# EAGLE board StoneWS_v2 (EAGLE 9.6.2)
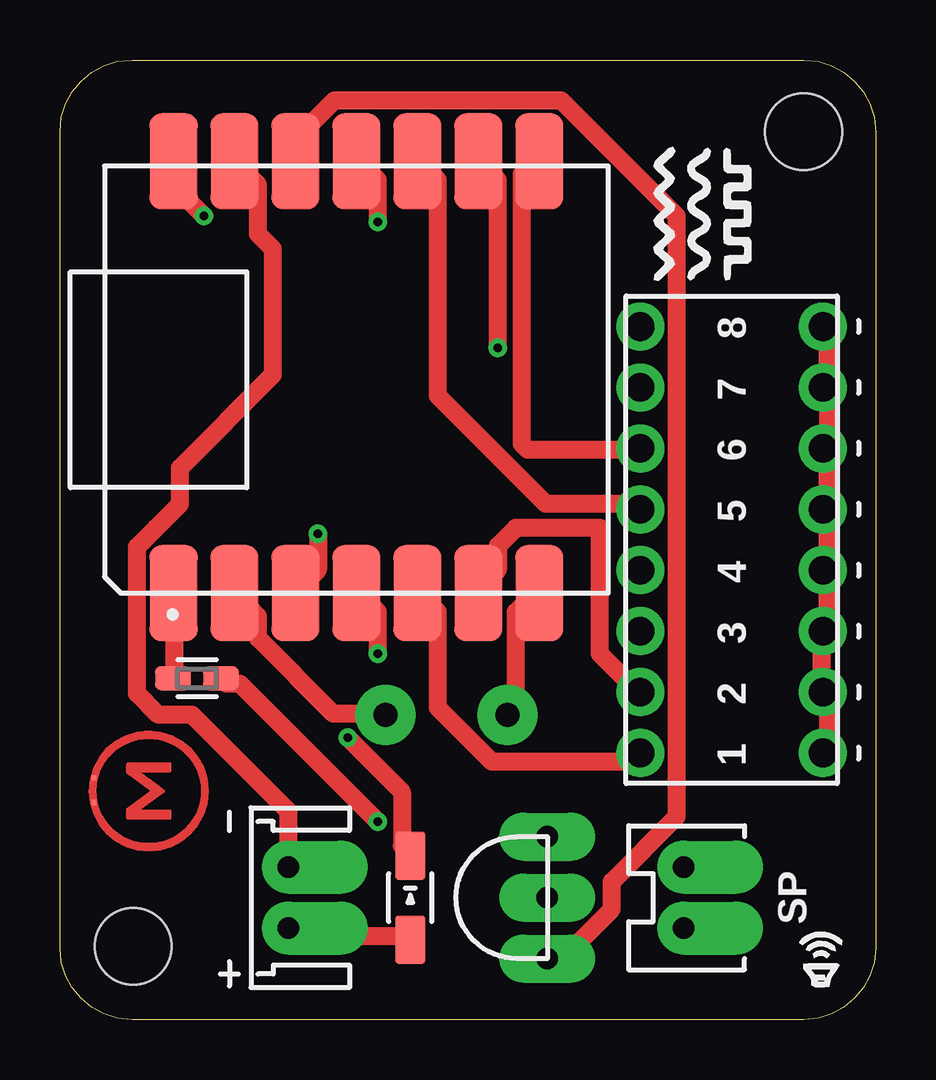
[diagram p0: board, top side]
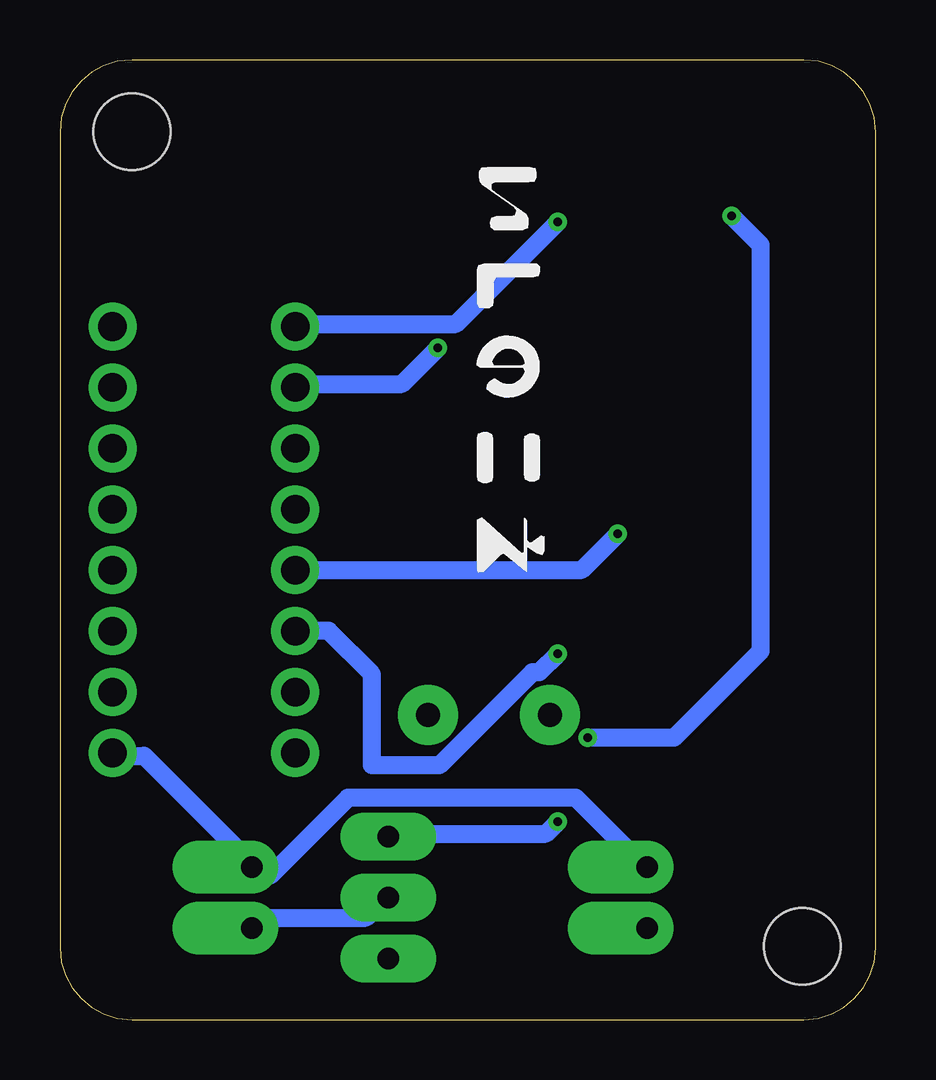
[diagram p1: board, bottom side, seen from below]

Size 34 x 40 mm. Coordinates in mm from the lower left corner, seen from the top.
Outline: 31,0 3,0 2.4,0.06 1.83,0.24 1.32,0.51 0.88,0.88 0.51,1.32 0.24,1.83 0.06,2.4 0,3 0,37 0.06,37.6 0.24,38.17 0.51,38.68 0.88,39.12 1.32,39.49 1.83,39.76 2.4,39.94 3,40 31,40 31.61,39.94 32.17,39.76 32.68,39.49 33.12,39.12 33.49,38.68 33.76,38.17 33.94,37.6 34,37 34,3 33.94,2.4 33.76,1.83 33.49,1.32 33.12,0.88 32.68,0.51 32.17,0.24 31.61,0.06 31,0
Copper layers (1*16): Top 0.035mm / dielectric 1.5mm / Bottom 0.035mm
Design rules "default *": minimum track width 0.2mm, minimum drill 0.35mm, track to track 6mil, track to pad 6mil, pad to pad 6mil, via to via 6mil, smd to smd 6mil, copper to edge 40mil, drill to drill 6mil, minimum pad ring 10mil, minimum via ring 8mil, stop-mask expansion 4mil, vias tented up to drill 0mil, thermal gap 10mil
Holes 3.2 mm at 31,37.02 3.05,3.05

## Footprints (pad centres in the part's own frame; a part is rotated, then mirrored left to right if it is on the bottom)
MOUDLE14P-2.54-21X17.8MM = smd 4 x 2: 1 0,18.12; 2 0,15.58; 3 0,13.04; 4 0,10.5; 5 0,7.96; 6 0,5.42; 7 0,2.88; 8 18,2.88; 9 18,5.42; 10 18,7.96; 11 18,10.5; 12 18,13.04; 13 18,15.58; 14 18,18.12
EH2_SMALL-OFFSET = drill 0.9 pad 2.2 offset: 1 -1.27,0; 2 1.27,0
SPEAKER = drill 0.9 pad 2.2 offset: + -1.27,0; - 1.27,0
TR-PNP = drill 0.9 pad 2 long: B -2.54,0; C 0,0; E 2.54,0
RESC1608X70N = smd 1.5 x 1: 1 -1,0; 2 1,0
DIODE-SS2040L = smd 2 x 1.27: P$1 -1.75,0; P$2 1.75,0
TOUCH-FLAT1 = drill 1 pad 2.5: P$1 0,0
M-LOGO = smd 0.2 x 0.2: P$1 -0.468,2.396; P$2 0.548,2.396
DIPSWITCH-8 = drill 1.2 pad 2: 11 -8.89,3.81; 12 -6.35,3.81; 13 -3.81,3.81; 14 -1.27,3.81; 15 1.27,3.81; 16 3.81,3.81; 17 6.35,3.81; 18 8.89,3.81; 21 -8.89,-3.81; 22 -6.35,-3.81; 23 -3.81,-3.81; 24 -1.27,-3.81; 25 1.27,-3.81; 26 3.81,-3.81; 27 6.35,-3.81; 28 8.89,-3.81

## Placement (x,y rotation side)
U1  [MOUDLE14P-2.54-21X17.8MM]  22.86,17.78 90 top
U$1  EH2-SMALL-OFFSET  [EH2_SMALL-OFFSET]  9.53,5.08 270 top
U$2  SPEAKER  [SPEAKER]  26,5.08 90 top
U$3  TR-PNP  [TR-PNP]  20.32,5.08 270 top
U$4  1k  [RESC1608X70N]  5.71,14.22 0 top
U$6  DIODE-SS2040L  [DIODE-SS2040L]  14.61,5.08 90 top
U$7  TOUCH-PTN-FL1  [TOUCH-FLAT1]  13.57,12.7 0 top
U$8  TOUCH-PTN-FL1  [TOUCH-FLAT1]  18.65,12.7 0 top
U$9  M-LOGO  [M-LOGO]  3.81,9.53 90 top
U$10  DIPSWITCH-8  [DIPSWITCH-8]  28,20 270 top

## Library data of the parts
U1 = Seeeduino XIAO
U$1 U$3 U$4 U$6-U$10 = Mathrax
U$2 = MATHRAX-standard

## Nets
N$1: U1.2 U$7.P$1
N$2: U1.11 U$10.21
N$3: U$1.2 U$6.P$1
N$4: U$3.B U$4.2
N$5: U1.12 U$3.E
N$6: U1.14 U$6.P$2
N$7: U1.7 U$8.P$1
N$8: U1.1 U$4.1
N$9: U1.13 U$1.1 U$2.- U$10.11 U$10.12 U$10.13 U$10.14 U$10.15 U$10.16 U$10.17 U$10.18
N$10: U1.9 U$10.22
N$11: U$9.P$1 U$9.P$2
N$12: U1.10 U$10.24
N$13: U1.3 U$10.25
N$14: U1.4 U$10.26
N$15: U1.5 U$10.28
N$16: U1.6 U$10.27
N$17: U$2.+ U$3.C
N$19: U1.8 U$10.23

## Tracks (layer width: path | path; a pad name or v marks a point on that pad's centre or on a via)
N$1
  Top 0.75: U$7.P$1 13.52,12.75 11.4,12.75 8.25,15.9 8.25,16.81 U1.2
N$2  (via drill 0.35)
  Top 0.75: v13.25,33.25 13.25,35 12.5,35.75 U1.11
  Bottom 0.75: v13.25,33.25 17.5,29 24,29 U$10.21
N$3
  Top 0.75: U$6.P$1 14.5,3.5 9.75,3.5 9.75,3.75 U$1.2
N$4  (via drill 0.35)
  Top 0.75: U$4.2 6.94,14 7.5,14 v13.25,8.25
  Bottom 0.75: v13.25,8.25 13.75,7.75 20.25,7.75 U$3.B
N$5
  Top 0.75: U$3.E 20.53,2.75 21.15,2.75 23,4.6 23,5.75 25.72,8.47 25.72,33.5 20.91,38.31 11.43,38.31 9.82,36.69 U1.12
N$6  (via drill 0.35)
  Top 0.75: v12,11.75 14.25,9.5 14.25,7.25 14.5,7 U$6.P$2 | v6,33.5 4.75,34.75 4.75,35.75 U1.14
  Bottom 0.75: v12,11.75 8.4,11.75 4.8,15.35 4.8,32.3 v6,33.5
N$7
  Top 0.75: U1.7 19.75,17.75 19,17 19,13 18.75,12.75 U$8.P$1
N$8
  Top 0.75: U$4.1 4.75,14.25 4.75,17.75 U1.1
N$9
  Top 0.75: U$10.11 32,28.75 32,26.5 U$10.12 32,26.25 32,24 U$10.13 32,23.5 32,21.5 U$10.14 32,21.25 32,19 U$10.15 32,18.5 32,16.5 U$10.16 31.75,16 31.75,14 U$10.17 32,13.5 32,11.25 U$10.18 | U1.13 8.25,34.81 8.25,32.75 8.88,32.12 8.88,26.88 5,23 5,21.49 4.01,20.5 3.21,19.71 3.21,13.59 4.1,12.7 5.5,12.7 9.53,8.68 U$1.1
  Bottom 0.75: U$10.18 31.75,11 30.5,11 26,6.5 U$2.- 26,6.25 25.75,6 25.25,6 22,9.25 12.5,9.25 9.75,6.5 U$1.1
N$10  (via drill 0.35)
  Top 0.75: v18.25,28 18.25,35 17.5,35.75 U1.9
  Bottom 0.75: v18.25,28 19.75,26.5 24,26.5 U$10.22
N$11
  Top 0.2: U$9.P$2 U$9.P$1
N$12
  Top 0.75: U1.10 15,35.75 15.75,35 15.75,26 20.25,21.5 24,21.5 U$10.24
N$13  (via drill 0.35)
  Top 0.75: v10.75,20.25 10.75,18.75 10,18 U1.3
  Bottom 0.75: v10.75,20.25 12.25,18.75 24,18.75 U$10.25
N$14  (via drill 0.35)
  Top 0.75: v13.25,15.25 13.25,17 12.5,17.75 U1.4
  Bottom 0.75: U$10.26 22.8,16.2 21,14.4 21,10.6 18.18,10.6 14.31,14.48 14.02,14.48 v13.25,15.25
N$15
  Top 0.75: U1.5 15,17.75 15.75,17 15.75,13 18,10.75 24,10.75 24,11 U$10.28
N$16
  Top 0.75: U1.6 17.5,18 18.25,18.75 18.25,19.75 19,20.5 22.5,20.5 22.5,15.25 24,13.75 U$10.27
N$17
  Bottom 0.75: U$3.C 20.5,5 21.25,4.25 25.75,4.25 26,4 U$2.+
N$19
  Top 0.75: U1.8 19.75,35.75 19.25,35.25 19.25,24 19.5,23.75 24,23.75 U$10.23

## Text on the board
tPlace: 8 | 7 | 6 | 5 | 4 | 3 | 2 | 1 | SP